# Altium PCB sensor.PcbDoc
Units mm, origin at the board's own origin, x right, y up, seen from the top; angles counter-clockwise.
Board outline 16 x 16 mm, 2 copper layers (Top Layer, Bottom Layer); 5 components, 6 nets, 91 pads, 34 vias.
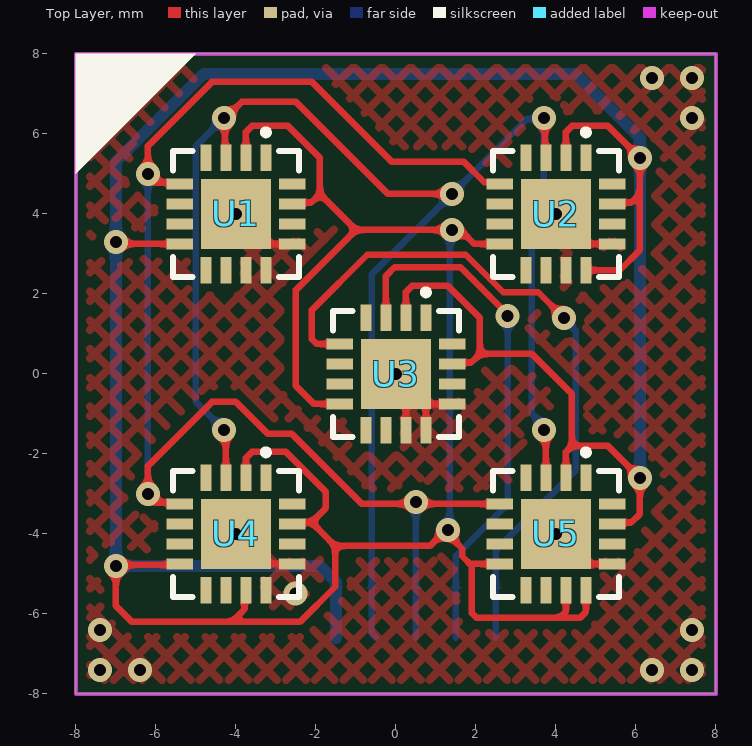
[diagram p0: Top Layer view]
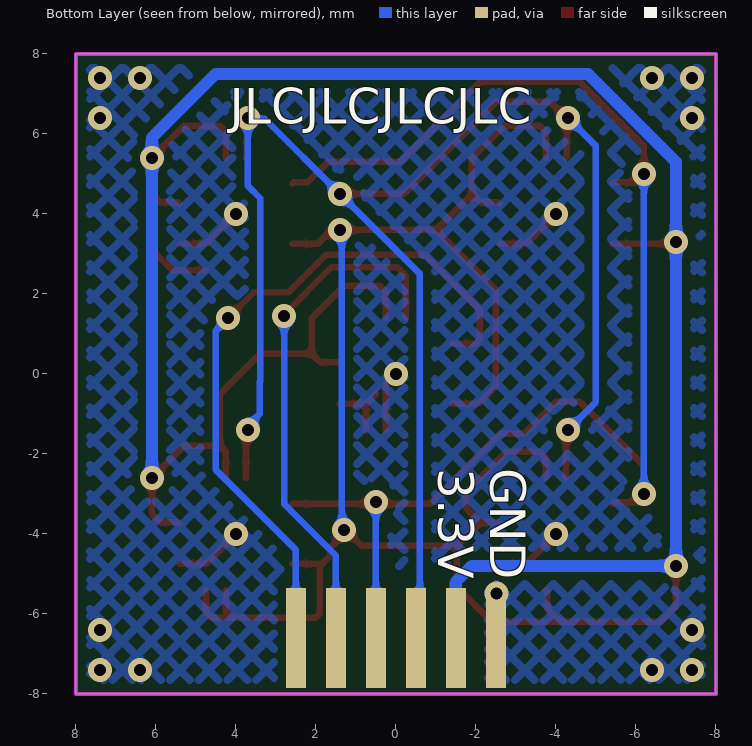
[diagram p1: Bottom Layer view, seen from below]
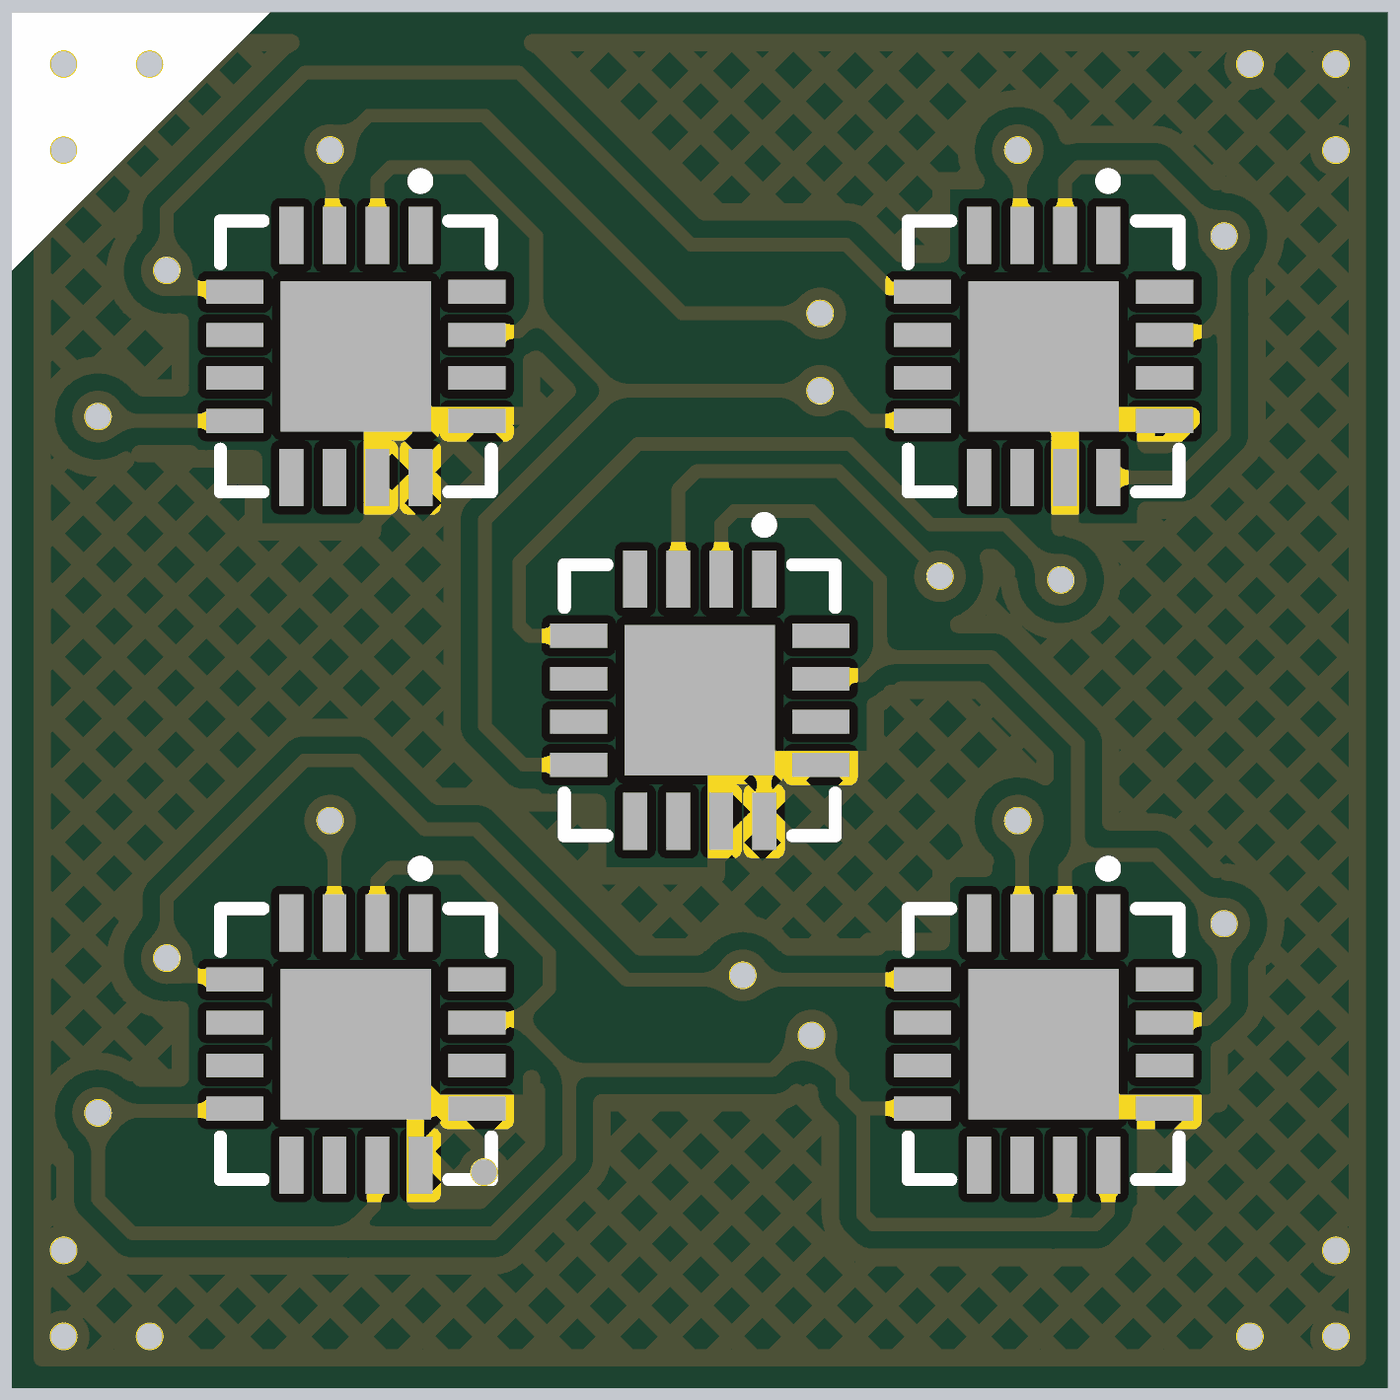
[diagram p2: 3D render of the assembled board from above, using the file's embedded part models]

## Layer stack, top to bottom
Top Solder: solder mask 0.0102, Solder Resist, Dk 3.5
Top Layer: signal copper 0.0356
Dielectric 1: dielectric 0.32, FR-4, Dk 4.8
Bottom Layer: signal copper 0.0356
Bottom Solder: solder mask 0.0102, Solder Resist, Dk 3.5

## Board outline
-8,-8 -8,8 8,8 8,-8

## Design rules (kind name [scope] priority, off if disabled: settings)
Clearance [All] p1: gap=0.2 ignorepadtopadclearanceinfootprint=TRUE except(0.117: Arc-Arc Arc-Track Arc-SMDPad Arc-THPad Arc-Text Arc-Hole Track-Track Track-SMDPad Track-THPad Track-Text Track-Hole SMDPad-SMDPad SMDPad-THPad SMDPad-Text SMDPad-Hole THPad-THPad THPad-Text THPad-Hole Fill-Text Fill-Hole Poly-Text Poly-Hole Region-Text Region-Hole Text-Text Text-Hole)
HoleSize [All] p1: absolutevalues=TRUE maxlimit=5 minlimit=0.025 maxpercent=80.000 minpercent=20.000
MinimumSolderMaskSliver [All] p1: minsoldermaskwidth=0
PolygonConnect [All] p1: connectstyle=Direct reliefconductorwidth=0.254 reliefentries=4 polygonreliefangle="90 Angle" airgapwidth=0.254
RoutingVias [All] p1: holewidth=0.3 width=0.6 viastyle="Through Hole" minholewidth=0.3 minwidth=0.6 maxholewidth=0.3 maxwidth=0.6
SilkToSilkClearance [All] p1: silktosilkclearance=0
SilkToSolderMaskClearance [IsPad] p1: minsilkscreentomaskgap=0 clearancetoexposedcopper=TRUE
SolderMaskExpansion [All] p1: expansion=0.102 istentingtop=FALSE
SupplyNets "Schematic Supply Nets_1" [InNet('GND')] p1: voltage=0.000
SupplyNets "Schematic Supply Nets" [InNet('VCC_PP3V3_MATRIX')] p2: voltage=0.000
Width [All] p1: maxlimit=1 minlimit=0.102 preferedwidth=0.2
26 further rules are at their usual default settings.

## Components (designator, comment, footprint, x,y, rotation, side; value= is the part's Value field where it differs from the comment)
U1 "MLX90393ELW-ABA-011-SP" QFN-16_L3.0-W3.0-P0.50-TR-EP1.7 -4,4 r0 top locked
U2 "MLX90393ELW-ABA-011-SP" QFN-16_L3.0-W3.0-P0.50-TR-EP1.7 4,4 r0 top locked
U3 "MLX90393ELW-ABA-011-SP" QFN-16_L3.0-W3.0-P0.50-TR-EP1.7 0,0 r0 top locked
U4 "MLX90393ELW-ABA-011-SP" QFN-16_L3.0-W3.0-P0.50-TR-EP1.7 -4,-4 r0 top locked
U5 "MLX90393ELW-ABA-011-SP" QFN-16_L3.0-W3.0-P0.50-TR-EP1.7 4,-4 r0 top locked

## Footprints (in the part's own frame and the unit in brackets; to place one, negate y for a bottom-side part, rotate by r counter-clockwise, add the part's x,y. Pads: shape width x height; smd on the part's side, far side on the other; paste and mask are expansions set on the pad)
QFN-16_L3.0-W3.0-P0.50-TR-EP1.7 [mm]
  rect 0.28x0.665 smd: 1(0.75,1.407) 2(0.25,1.407) 3(-0.25,1.407) 4(-0.75,1.407) 9(-0.75,-1.407) 10(-0.25,-1.407) 11(0.25,-1.407) 12(0.75,-1.407)
  rect 0.665x0.28 smd: 5(-1.407,0.75) 6(-1.407,0.25) 7(-1.407,-0.25) 8(-1.407,-0.75) 13(1.407,-0.75) 14(1.407,-0.25) 15(1.407,0.25) 16(1.407,0.75)
  rect 1.75x1.75 smd: 17(0,0)
  silkscreen extent -1.58,-1.58 1.58,2.11, body extent -1.5,-1.5 1.5,1.5

## Part data
U1 U2 U3 U4 U5: "3D磁传感器", BOM_JLCPCB Part Class="Extended Part", BOM_Manufacturer=Melexis(比利时迈来芯), BOM_Manufacturer Part=MLX90393ELW-ABA-011-SP, BOM_Supplier=LCSC, BOM_Supplier Part=C1526586, Contributor=LCSC, spicePre=U, spiceSymbolName=MLX90393ELW-ABA-011-SP

## Free pads (board coordinates)
  rect 0.5x2.5 smd far side: 1(-2.5,-6.6) 1(-1.5,-6.6) 1(-0.5,-6.6) 1(0.5,-6.6) 1(1.5,-6.6) 1(2.5,-6.6)

## Via types
v1: diameter 0.6, hole 0.3, Top Layer to Bottom Layer, tented both sides, 33 vias
v2: diameter 0.6/0.6 (per signal layer), hole 0.3, Top Layer to Bottom Layer, tented both sides, 1 vias

## Nets (pads, with @x,y where several pads share a name; then routed paths per layer and width w, separated by ;. In a path a pad name is that pad's centre, name@x,y a point inside that pad or via, vN(x,y) a via of type N, cw(c..) or ccw(c..) an arc to the next point about the centre after c; other vN are vias at no path point)
GND: pad.1@-2.5,-6.6 U1.11 U1.12 U1.13 U1.17 U2.11 U2.13 U2.17 U3.11 U3.12 U3.13 U3.17 U4.12 U4.13 U4.17 U5.13 U5.17 | length 9.7
  Top Layer w0.16: v1(-4,-4) -3.25,-4.75 U4.13 ; v1(-4,4) -3.25,3.25 U1.13 ; U3.11 U3.17@0.25,-0.25 ; U3.17@0.5,-0.5 U3.17@0.75,-0.75 ; U3.12 U3.17@0.75,-0.75 ; U3.13 U3.17@0.75,-0.75 ; v1(4,-4) 4.75,-4.75 U5.13 ; v1(4,4) 4.75,3.25 U2.13
  other v1: -7.4,-7.4 -6.4,-7.4 6.4,-7.4 7.4,-7.4 -7.4,-6.4 7.4,-6.4 0,0 -7.4,6.4 7.4,6.4 -7.4,7.4 -6.4,7.4 6.4,7.4 7.4,7.4
  other v2: -2.51,-5.49
I2C1_SCL: pad.1@-0.5,-6.6 U1.3 U2.3 U4.3 U5.3 | length 42.8
  Top Layer w0.16: v1(-4.3,-1.4) -4.25,-1.45 U4.3 ; U1.3 -4.275,5.432 -4.275,6.375 v1(-4.3,6.4) -4.251,6.4 -3.851,6.8 -2.5,6.8 -0.2,4.5 v1(1.4,4.5) ; v1(3.7,-1.4) 3.75,-1.45 U5.3 ; v1(3.7,6.4) 3.725,6.375 3.725,5.432 U2.3
  Bottom Layer w0.16: v1(-4.3,-1.4) -5,-0.7 -5,5.7 v1(-4.3,6.4) ; pad.1@-0.5,-6.6 -0.6,-6.5 -0.6,2.5 v1(1.4,4.5) 3.276,6.376 3.676,6.376 v1(3.7,6.4) 3.7,4.7 3.395,4.395 3.395,-0.195 3.4,-0.2 3.4,-0.992 3.7,-1.292 v1(3.7,-1.4)
I2C1_SDA: pad.1@0.5,-6.6 U1.5 U2.5 U4.5 U5.5 | length 35.6
  Top Layer w0.16: U4.5 -5.447,-3.21 -5.99,-3.21 v1(-6.2,-3) -6.2,-2.3 -4.6,-0.7 -4,-0.7 -3.2,-1.5 -2.6,-1.5 -0.85,-3.25 0.5,-3.25 U5.5 ; U1.5 -5.447,4.79 -5.99,4.79 v1(-6.2,5) -6.2,5.7 -4.6,7.3 -2.1,7.3 -0.1,5.3 1.7,5.3 2.21,4.79 2.553,4.79 U2.5
  Bottom Layer w0.16: v1(-6.2,-3) v1(-6.2,5) ; pad.1@0.5,-6.6 v1(0.5,-3.2)
I2C2_SCL: pad.1@1.5,-6.6 U3.3 | length 13.3
  Top Layer w0.16: U3.3 -0.25,2.45 -0.034,2.666 1.616,2.666 2.795,1.487 v1(2.795,1.443)
  Bottom Layer w0.16: pad.1@1.5,-6.6 1.5,-4.549 2.795,-3.254 v1(2.795,1.443)
I2C2_SDA: pad.1@2.5,-6.6 U3.5 | length 18
  Top Layer w0.16: U3.5 -1.983,0.75 -2.1,0.867 -2.1,1.6 -0.717,2.983 1.747,2.983 2.687,2.043 3.557,2.043 v1(4.2,1.4)
  Bottom Layer w0.16: pad.1@2.5,-6.6 2.5,-4.4 4.5,-2.4 4.5,1.083 4.2,1.383 v1(4.2,1.4)
VCC_PP3V3_MATRIX: pad.1@-1.5,-6.6 U1.2 U1.8 U1.15 U2.2 U2.8 U2.12 U2.15 U3.2 U3.8 U3.15 U4.2 U4.8 U4.11 U4.15 U5.2 U5.8 U5.11 U5.12 U5.15 | length 111.7
  Top Layer w0.16: v1(-7,3.3) -6.95,3.25 U1.8 ; U4.8 -5.432,-4.775 -6.975,-4.775 v1(-7,-4.8) -7,-5.8 -6.6,-6.2 -4.1,-6.2 ; U4.11 -3.79,-5.447 -3.79,-5.89 -4.1,-6.2 ; U4.2 -3.75,-2.1 -3.6,-1.95 -2.75,-1.95 -1.75,-2.95 -1.75,-3.35 -2.11,-3.71 ; U1.2 -3.75,6.05 -3.6,6.2 -2.7,6.2 -1.9,5.4 -1.9,4.5 ; U4.15 -2.553,-3.71 -2.11,-3.71 ; U1.15 -2.553,4.29 -2.11,4.29 -1.9,4.5 ; U3.8 -2.05,-0.75 -2.5,-0.3 -2.5,2.1 -1,3.6 ; U3.2 0.25,2.05 0.4,2.2 1.3,2.2 2.1,1.4 2.1,0.5 ; U3.15 1.447,0.29 1.89,0.29 2.1,0.5 ; 1.85,-4.75 U5.8 ; U2.8 1.96,3.25 1.687,3.523 1.477,3.523 v1(1.4,3.6) -1,3.6 ; U5.11 4.25,-5.95 4.1,-6.1 ; U5.2 4.25,-1.95 4.4,-1.8 ; U2.2 4.25,6.05 4.4,6.2 5.3,6.2 v1(6.1,5.4) 6.1,4.5 ; U5.12 4.75,-5.95 4.6,-6.1 4.1,-6.1 ; U2.12 5.593,2.593 6.1,3.1 6.1,4.5 ; U5.15 5.447,-3.71 5.89,-3.71 6.1,-3.5 v1(6.1,-2.6) 5.3,-1.8 4.4,-1.8 ; U2.15 5.447,4.29 5.89,4.29 6.1,4.5 ; -4.1,-6.2 -2.4,-6.2 -1.52,-5.32 -1.52,-4.3 ; -2.11,-3.71 -1.52,-4.3 ; -1.9,4.5 -1,3.6 ; -1.52,-4.3 0.851,-4.3 1.251,-3.9 v1(1.3,-3.9) 1.3,-4.008 1.659,-4.368 1.659,-4.559 1.9,-4.8 1.9,-5.983 2.017,-6.1 4.1,-6.1 ; 2.1,0.5 3.4,0.5 4.4,-0.5 4.4,-1.8
  Bottom Layer w0.16: v1(1.3,-3.9) 1.35,-3.85 1.35,3.55 v1(1.4,3.6)
  Bottom Layer w0.3: pad.1@-1.5,-6.6 -1.5,-5.2 -1.9,-4.8 v1(-7,-4.8) v1(-7,3.3) -7,5.3 -4.8,7.5 4.5,7.5 6.1,5.9 v1(6.1,5.4) v1(6.1,-2.6)
pads on no net: U1.1 U1.4 U1.6 U1.7 U1.9 U1.10 U1.14 U1.16 U2.1 U2.4 U2.6 U2.7 U2.9 U2.10 U2.14 U2.16 U3.1 U3.4 U3.6 U3.7 U3.9 U3.10 U3.14 U3.16 U4.1 U4.4 U4.6 U4.7 U4.9 U4.10 U4.14 U4.16 U5.1 U5.4 U5.6 U5.7 U5.9 U5.10 U5.14 U5.16

## Polygon pours and split planes (outlines as drawn)
GND on Top Layer "GND_L01_P000" (hatched 45Degree grid 0.508 track 0.203, remove dead copper, pour order 0): -8,-8 -8,8 8,8 8,-8
GND on Bottom Layer "GND_L02_P001" (hatched 45Degree grid 0.508 track 0.203, remove dead copper, pour order 1): -8,-8 -8,8 8,8 8,-8

## Keep-outs
Keep-Out Layer:
  the board outline again, w0.1

## Other copper
Bottom Layer:
  pour cut-out: -2.3,-4.8 -2.3,-8 2.8,-8 2.8,-4.8

## Silkscreen, mask and mechanical layers (free items; w line width, h text height)
Top Overlay:
  region: -8,8 -8,5 -5,8
Bottom Overlay:
  text "JLCJLCJLCJLC" at 4.158,6.252 h0.89
  text "GND" at -2.352,-2.352 h0.89 r90
  text "3.3V" at -1.052,-2.352 h0.89 r90